# Altium PCB pillBox_with_WUB.PcbDoc
Units mm, origin at the board's own origin, x right, y up, seen from the top; angles counter-clockwise.
Board outline 27.65 x 29.15 mm, 2 copper layers (Top Layer, Bottom Layer); 17 components, 16 nets, 71 pads, 18 vias.
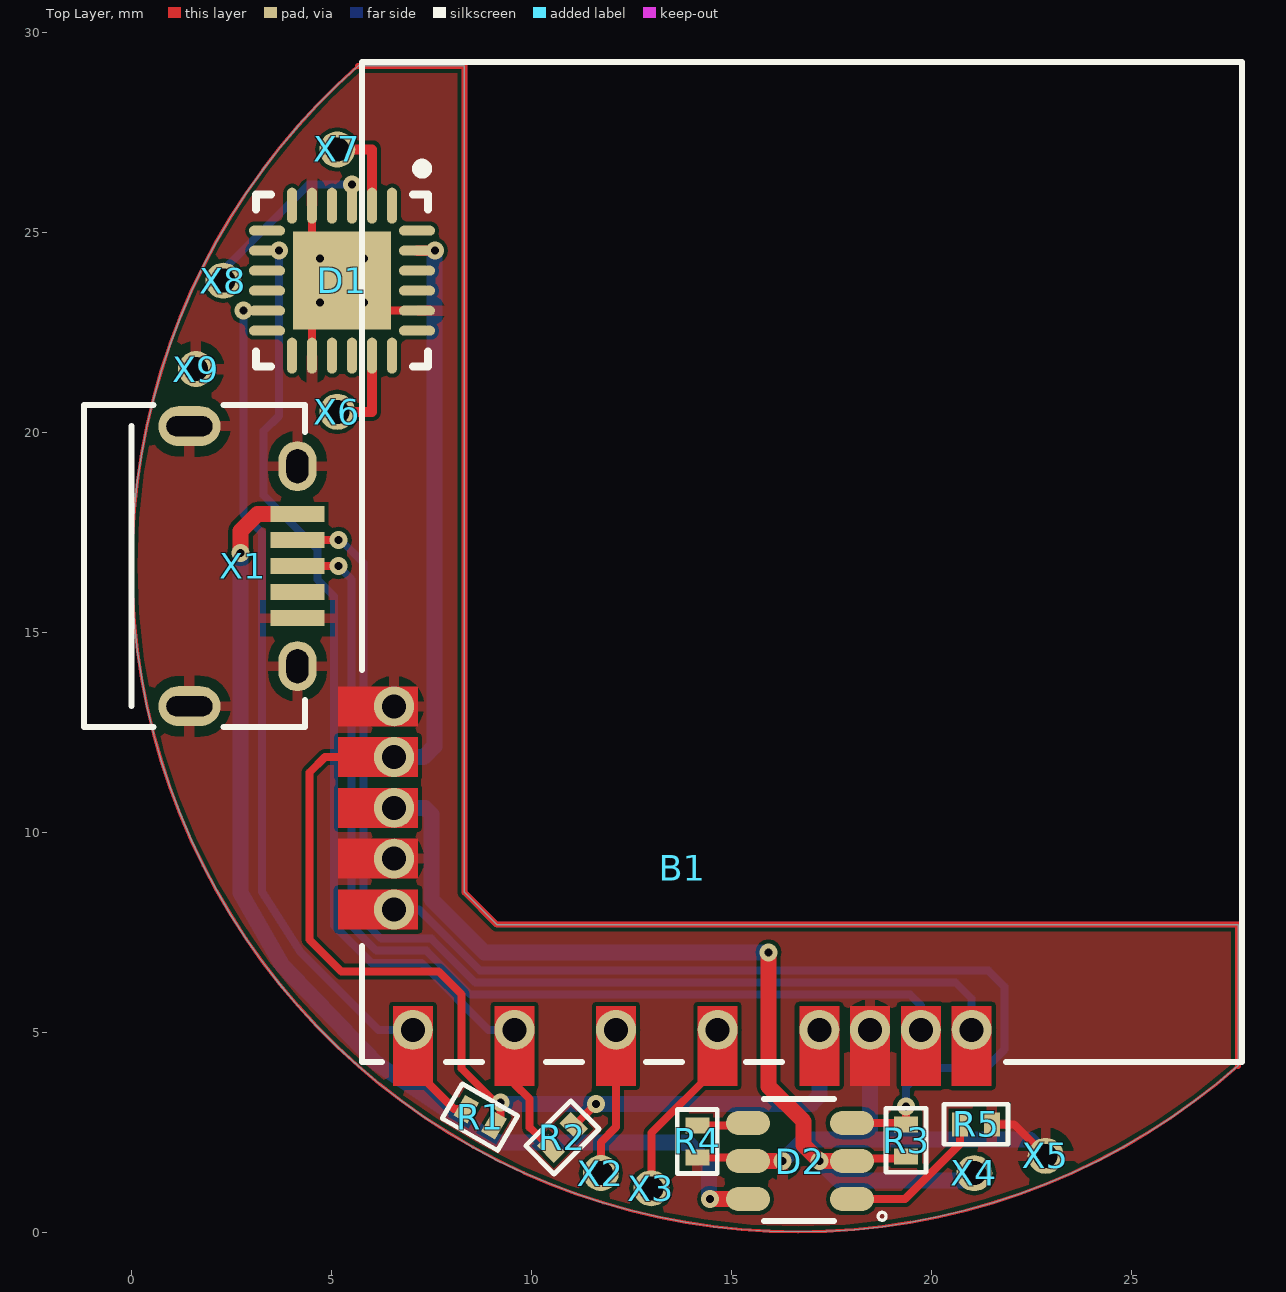
[diagram p0: Top Layer view]
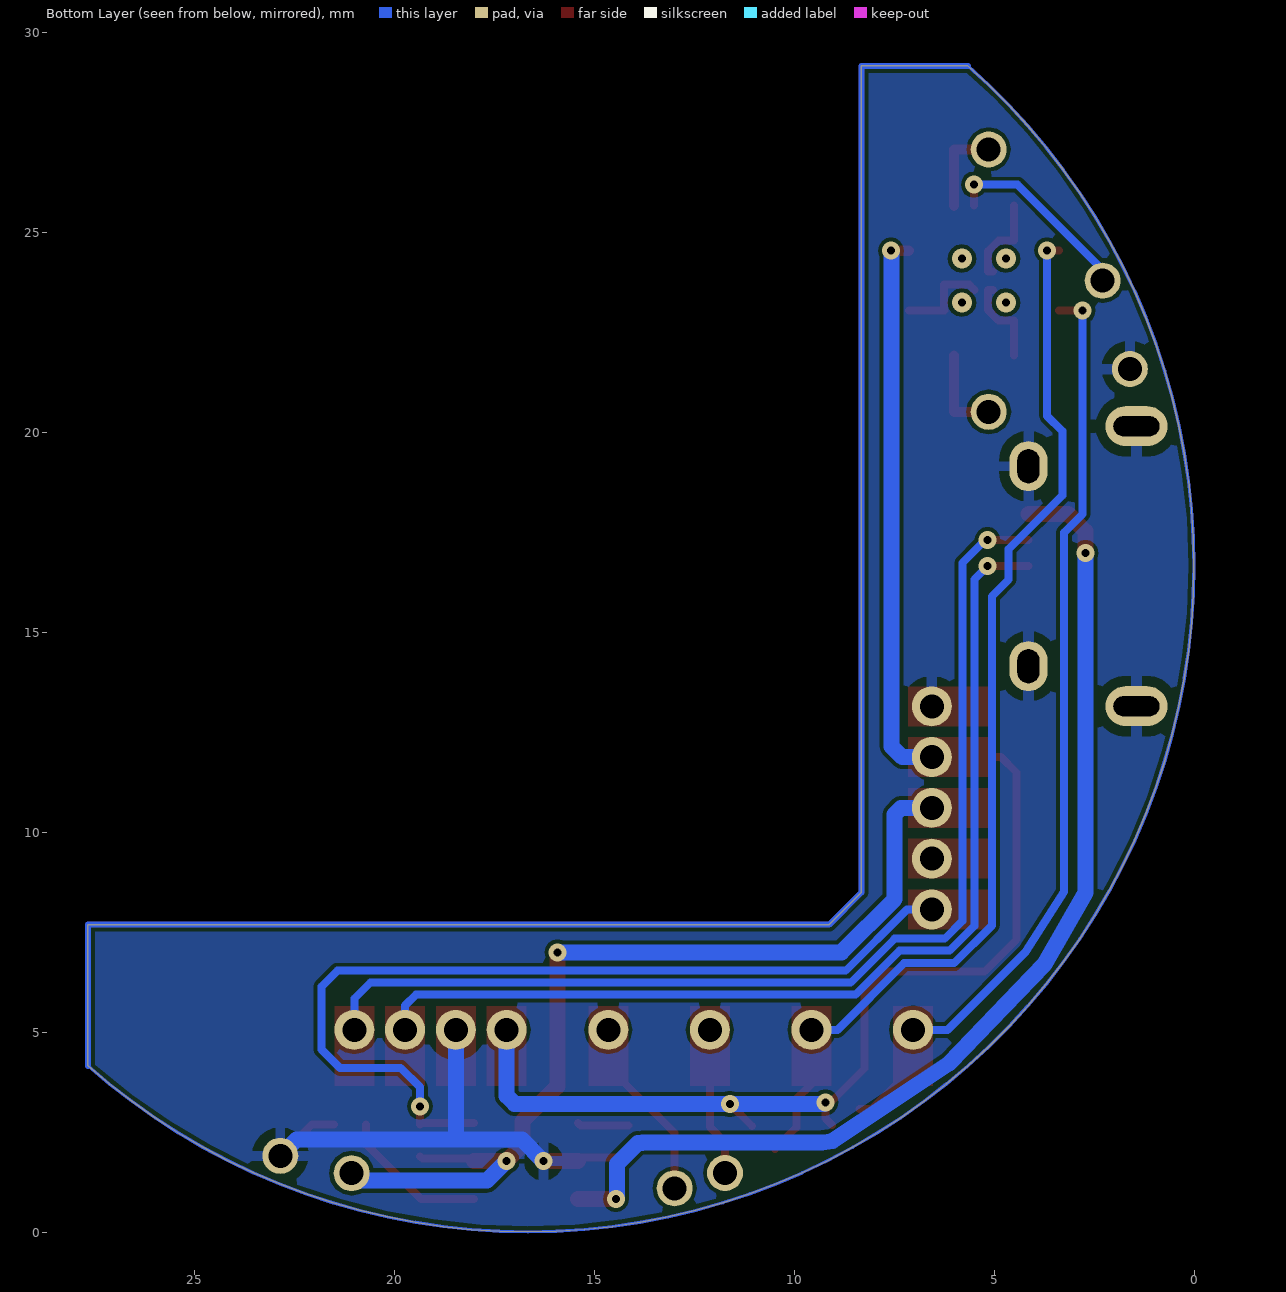
[diagram p1: Bottom Layer view, seen from below]

## Layer stack, top to bottom
Top Solder: solder mask 0.0102, Solder Resist, Dk 3.5
Top Layer: signal copper 0.0356
Dielectric 1: dielectric 0.32, FR-4, Dk 4.8
Bottom Layer: signal copper 0.0356
Bottom Solder: solder mask 0.0102, Solder Resist, Dk 3.5

## Board outline
27.66,4.16 cw(c16.66,16.66) 5.66,29.16 8.32,29.16 8.32,8.5 9.13,7.69 27.66,7.69

## Design rules (kind name [scope] priority, off if disabled: settings)
Clearance [All] p1: gap=0.1
PolygonConnect [All] p1: connectstyle=Relief reliefconductorwidth=0.254 reliefentries=4 polygonreliefangle="90 Angle" airgapwidth=0.254
RoutingVias [All] p1: holewidth=0.2 width=0.45 viastyle="Through Hole" minholewidth=0.2 minwidth=0.45 maxholewidth=0.2 maxwidth=0.45
SolderMaskExpansion [All] p1: expansion=0.102
Width Width_power [InNet('3v3')] p1: maxlimit=0.5 minlimit=0.2 preferedwidth=0.3
Width [All] p2: maxlimit=0.5 minlimit=0.12 preferedwidth=0.2
30 further rules are at their usual default settings.

## Components (designator, comment, footprint, x,y, rotation, side; value= is the part's Value field where it differs from the comment)
B1 "WUB" WUB_01 5.76,4.26 r0 top locked
D1 "ZSSC3230" QFN24 5.26,23.79 r270 top
D2 "bq21040" SOT-23 18.01,0.83 r180 top
R1 "R" R0402 8.71,2.88 r330 top
R2 "R" R0402 10.77,2.37 r45 top
R3 "100k" R0402 19.36,2.3 r90 top
R4 "R" R0402 14.14,2.27 r90 top
R5 "10k" R0402 21.11,2.7 r180 top
X1 "microUsb" 10118194-0001LF 4.145,17.951 r270 top locked
X2 "PinConnect" PinConnect2#1 10.93,1.48 r0 top
X3 "PinConnect" PinConnect2#1 12.19,1.1 r0 top
X4 "PinConnect" PinConnect2#1 20.265,1.476 r0 top
X5 "PinConnect" PinConnect2#1 22.05,1.91 r0 top
X6 "PinConnect" PinConnect2#1 5.14,19.71 r90 top
X7 "PinConnect" PinConnect2#1 5.14,26.27 r90 top
X8 "PinConnect" PinConnect2#2 2.29,22.98 r90 top
X9 "PinConnect" PinConnect2#1 1.61,20.78 r90 top

## Footprints (in the part's own frame and the unit in brackets; to place one, negate y for a bottom-side part, rotate by r counter-clockwise, add the part's x,y. Pads: shape width x height; smd on the part's side, far side on the other; paste and mask are expansions set on the pad)
10118194-0001LF [mm]
  rect 0.4x1.35 smd: 1(0,0) 2(0.65,0) 3(1.3,0) 4(1.95,0) 5(2.6,0)
  oval 1x1.55 hole 1.15 slot 0.5 at 0 deg: 5(-2.2,-2.7) 5(4.8,-2.7)
  oval 1.25x0.95 hole 0.85 slot 0.55 at 90 deg: 5(-1.2,0) 5(3.8,0)
  silkscreen extent -2.73,-5.34 5.32,0.19
PinConnect2#1 [mm]
  round 0.9 hole 0.6: 1(0.8,0)
PinConnect2#2 [mm]
  round 0.9 hole 0.6: 1(0.81,0)
QFN24 [mm]
  oval 0.9x0.25 smd: 1(-1.875,1.25) 2(-1.875,0.75) 3(-1.875,0.25) 4(-1.875,-0.25) 5(-1.875,-0.75) 6(-1.875,-1.25) 13(1.875,-1.25) 14(1.875,-0.75) 15(1.875,-0.25) 16(1.875,0.25) 17(1.875,0.75) 18(1.875,1.25)
  oval 0.25x0.9 smd: 7(-1.25,-1.875) 8(-0.75,-1.875) 9(-0.25,-1.875) 10(0.25,-1.875) 11(0.75,-1.875) 12(1.25,-1.875) 19(1.25,1.875) 20(0.75,1.875) 21(0.25,1.875) 22(-0.25,1.875) 23(-0.75,1.875) 24(-1.25,1.875)
  rect 2.45x2.45 smd: 25(0,0)
  silkscreen extent -2.92,-2.15 2.15,2.15, body extent -2,-2 2,2, height 0.9
R0402 [mm]
  rect 0.4x0.6 smd: 1(-0.4,0) 2(0.4,0)
  silkscreen extent -0.8,-0.5 0.8,0.5
SOT-23 [mm]
  oval 1.1x0.6 smd: 1(0,0) 2(0,-0.95) 3(0,-1.9) 4(2.6,-1.9) 5(2.6,-0.95) 6(2.6,0)
  silkscreen extent -0.85,-2.5 2.2,0.55, body extent 0.45,-2.5 2.2,0.55, height 1.1
WUB_01 [mm]
  round 1 hole 0.6: 1(0.8,8.89) 2(0.8,7.62) 3(0.8,6.35) 4(0.8,5.08) 5(0.8,3.81) 6(1.27,0.8) 7(3.81,0.8) 8(6.35,0.8) 9(8.89,0.8) 10(11.43,0.8) 11(12.7,0.8) 12(13.97,0.8) 13(15.24,0.8)
  Top Layer region: -0.6,8.39 1.4,8.39 1.4,9.39 -0.6,9.39
  Top Layer region: -0.6,7.12 1.4,7.12 1.4,8.12 -0.6,8.12
  Top Layer region: -0.6,5.85 1.4,5.85 1.4,6.85 -0.6,6.85
  Top Layer region: -0.6,4.58 1.4,4.58 1.4,5.58 -0.6,5.58
  Top Layer region: -0.6,3.31 1.4,3.31 1.4,4.31 -0.6,4.31
  Top Layer region: 1.77,-0.6 1.77,1.4 0.77,1.4 0.77,-0.6
  Top Layer region: 4.31,-0.6 4.31,1.4 3.31,1.4 3.31,-0.6
  Top Layer region: 6.85,-0.6 6.85,1.4 5.85,1.4 5.85,-0.6
  Top Layer region: 9.39,-0.6 9.39,1.4 8.39,1.4 8.39,-0.6
  Top Layer region: 11.93,-0.6 11.93,1.4 10.93,1.4 10.93,-0.6
  Top Layer region: 13.2,-0.6 13.2,1.4 12.2,1.4 12.2,-0.6
  Top Layer region: 14.47,-0.6 14.47,1.4 13.47,1.4 13.47,-0.6
  Top Layer region: 15.74,-0.6 15.74,1.4 14.74,1.4 14.74,-0.6
  silkscreen extent 0,0 22,25

## Part data
R3 R5: library part R

## Via types
v1: diameter 0.45, hole 0.2, Top Layer to Bottom Layer, tented both sides, 14 vias
v2: diameter 0.5, hole 0.2, Top Layer to Bottom Layer, 4 vias

## Nets (pads, with @x,y where several pads share a name; then routed paths per layer and width w, separated by ;. In a path a pad name is that pad's centre, name@x,y a point inside that pad or via, vN(x,y) a via of type N, cw(c..) or ccw(c..) an arc to the next point about the centre after c; other vN are vias at no path point)
3v3: B1.2 B1.10 D1.23 R1.2 R2.2 | length 39.1
  Top Layer w0.2: B1.2 4.83,11.88 4.44,11.49 4.44,7.32 5.24,6.52 7.676,6.52 8.25,5.946 8.25,4.09 9.09,3.25 v1(9.22,3.25) 9.22,2.844 R1.2 ; R2.2 v1(11.61,3.21)
  Top Layer w0.254: D1.23 v1(7.58,24.54)
  Bottom Layer w0.4: B1.2 7.3,11.88 7.57,12.15 7.57,24.53 v1(7.58,24.54) ; v1@9.26,3.21 v1(11.61,3.21) 16.99,3.21 17.19,3.41 B1.10
GND: B1.1 B1.4 B1.11 D1.5 D1.14 D1.20 D1.25 D2.5 R4.1 R5.1 X1.5 X5.1 X9.1 | length 20.5
  Top Layer w0.2: D1.14 4.51,22.79 4.896,22.79 5.16,23.054 5.16,23.558 D1.25@5.028,23.558 ; D1.5 4.51,24.79 4.896,24.79 5.16,24.526 5.16,24.022 D1.25@5.028,24.022 ; D1.25@5.492,23.558 5.624,23.69 6.26,23.69 6.26,23.054 6.246,23.04 D1.20 ; R4.1 15.32,1.87 D2.5 ; R5.1 22.06,2.7 X5.1
  Top Layer w0.4: D2.5 v1(16.27,1.78)
  Bottom Layer w0.4: v1(16.27,1.78) 16.81,2.32 22.44,2.32 X5.1 ; B1.11 18.46,2.42 18.555,2.325
NetB1_8: B1.8 X2.1 | length 3.7
  Top Layer w0.2: X2.1 11.73,2.25 12.11,2.63 B1.8
NetB1_9: B1.9 X3.1 | length 4.6
  Top Layer w0.2: X3.1 12.99,2.48 14.65,4.14 B1.9
NetD1_2: D1.2 X7.1 | length 2.5
  Top Layer w0.254: X7.1@4.94,27.07 X7.1 6.01,27.07 D1.2
NetD1_3: D1.3 X8.1 | length 4.9
  Top Layer w0.2: D1.3 v1(5.51,26.19)
  Bottom Layer w0.2: X8.1 2.29,24.06 4.42,26.19 v1(5.51,26.19)
NetD1_17: D1.17 X6.1 | length 2.3
  Top Layer w0.254: X6.1 6.01,20.51 D1.17
NetD2_1: D2.1 R5.2 | length 3.8
  Top Layer w0.2: D2.1 19.33,0.83 20.71,2.21 R5.2
NetD2_4: D2.4 R4.2 | length 1.3
  Top Layer w0.2: R4.2 15.35,2.67 D2.4
SCL: B1.7 D1.8 R2.1 | length 27
  Top Layer w0.2: D1.8 3.395,24.55 v1(3.68,24.55) ; B1.7 9.57,3.71 9.95,3.33 9.95,2.624 R2.1
  Bottom Layer w0.2: v1(3.68,24.55) 3.68,20.41 3.3,20.03 3.3,18.42 4.64,17.08 4.64,16.32 5.06,15.9 5.06,7.671 6.001,6.73 7.252,6.73 8.922,5.06 B1.7
SDA: B1.6 D1.11 R1.1 | length 23.4
  Top Layer w0.2: v1(2.79,23.04) D1.11 ; B1.6 7.03,4.11 8.06,3.08 R1.1
  Bottom Layer w0.2: v1(2.79,23.04) 2.79,17.96 3.26,17.49 3.26,8.516 4.21,7.02 6.17,5.06 B1.6
SWCLK: B1.13 X1.2 | length 27.6
  Top Layer w0.2: X1.2 v1(5.171,17.301)
  Bottom Layer w0.2: v1(5.171,17.301) 5.229,17.301 5.8,16.73 5.8,7.78 6.24,7.34 7.49,7.34 8.59,6.24 20.6,6.24 21,5.84 B1.13
SWDIO: B1.12 X1.3 | length 25.8
  Top Layer w0.2: X1.3 v1(5.169,16.651)
  Bottom Layer w0.2: v1(5.169,16.651) 5.5,16.32 5.5,7.656 6.116,7.04 7.366,7.04 8.466,5.94 19.46,5.94 19.73,5.67 B1.12
Vbat: B1.3 D2.2 R3.1 X4.1 | length 24
  Top Layer w0.2: D2.2 18.07,1.84 19.3,1.84 R3.1
  Top Layer w0.4: v1(15.92,7) 15.92,3.65 16.8,2.77 16.8,2.18 v1(17.2,1.78) D2.2
  Bottom Layer w0.4: B1.3 7.33,10.61 7.49,10.45 7.49,8.33 8.82,7 v1(15.92,7) ; v1(17.2,1.78) 17.68,1.3 X4.1@20.92,1.3
Vbat_sense: B1.5 D2.3 R3.2 | length 22.7
  Top Layer w0.2: D2.3 R3.2@19.33,2.73 ; R3.2 v1(19.36,3.15)
  Bottom Layer w0.2: B1.5 7.184,8.07 8.714,6.54 21.42,6.54 21.82,6.14 21.82,4.57 21.36,4.11 19.84,4.11 19.36,3.63 v1(19.36,3.15)
Vusb: D2.6 X1.1 | length 27
  Top Layer w0.4: v1(2.72,16.98) 2.72,17.53 3.141,17.951 X1.1 ; v1(14.46,0.83) D2.6
  Bottom Layer w0.4: v1(2.72,16.98) 2.72,8.49 3.743,6.701 6.13,4.22 9.039,2.284 9.308,2.24 13.799,2.24 13.803,2.236 ; 13.91,2.23 14.43,1.71 14.43,0.86 v1(14.46,0.83)
pads on no net: D1.1 D1.4 D1.6 D1.7 D1.9 D1.10 D1.12 D1.13 D1.15 D1.16 D1.18 D1.19 D1.21 D1.22 D1.24 X1.4
copper on no net:
  other v2: 4.71,23.24 5.81,23.24 4.71,24.34 5.81,24.34

## Polygon pours and split planes (outlines as drawn)
GND on Top Layer "GND" (solid, remove dead copper, pour order 2): -3.45,30.11 -3.45,-1.65 -3.52,-1.72 -2.64,-2.6 31.52,-2.6 31.52,30.48 31.38,30.62
GND on Bottom Layer "GND" (solid, remove dead copper, pour order 4): -3.4,30.68 -3.66,30.42 -3.66,-2.17 31.41,-2.17 31.75,-2.51 32.34,-1.92 32.34,30.51

## Other copper
Multi-Layer:
  the board outline again, w0.08

## Silkscreen, mask and mechanical layers (free items; w line width, h text height)
Mechanical 1:
  the board outline again, w0.15